# Altium PCB Python_stm32f4_V1.0.0.PcbDoc
Units mil, origin at the board's own origin, x right, y up, seen from the top; angles counter-clockwise.
Board outline 1850 x 1920 mil, 2 copper layers (Top Layer, Bottom Layer); 62 components, 70 nets, 251 pads, 193 vias.
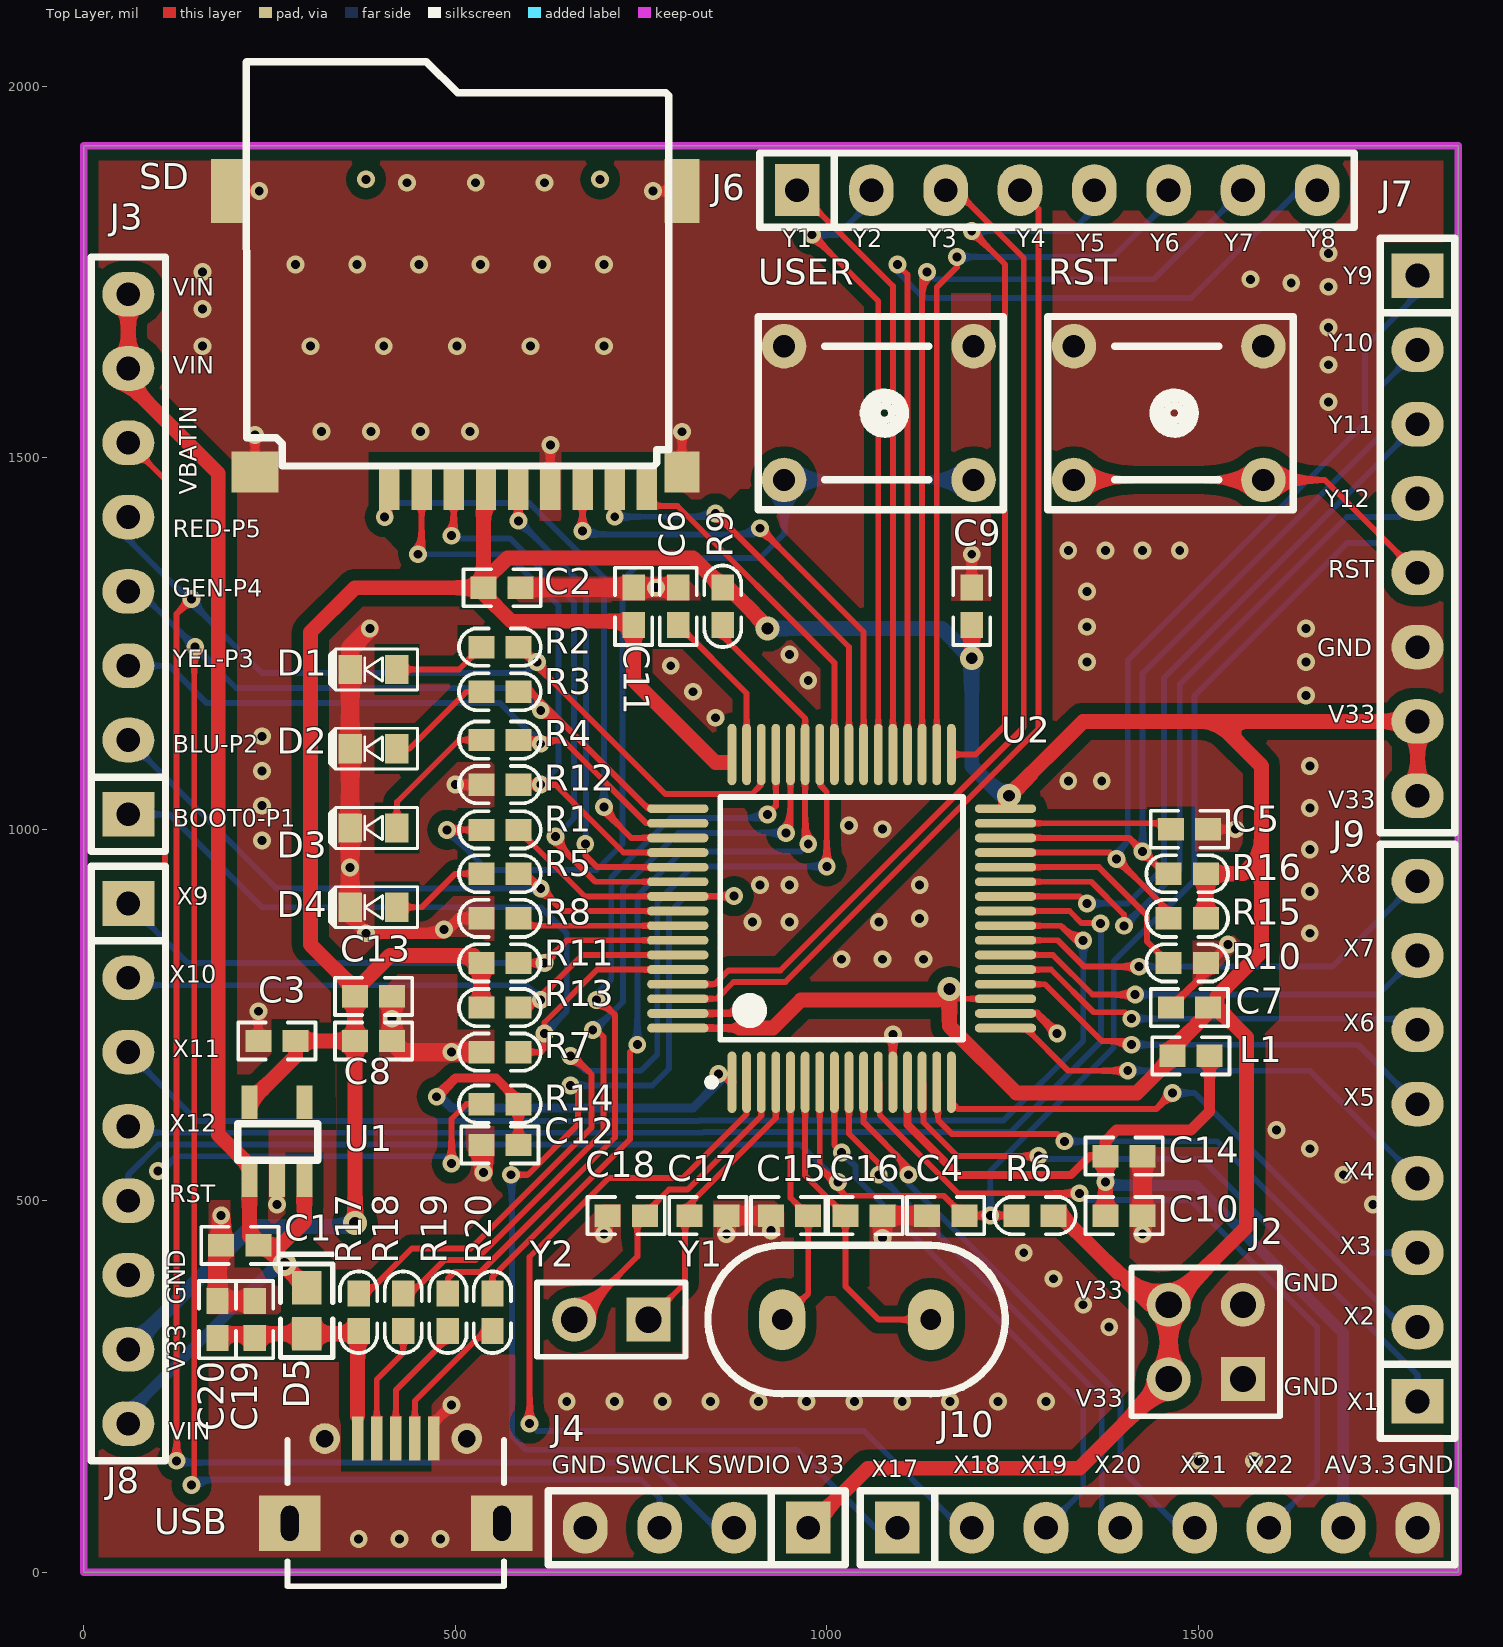
[diagram p0: Top Layer view]
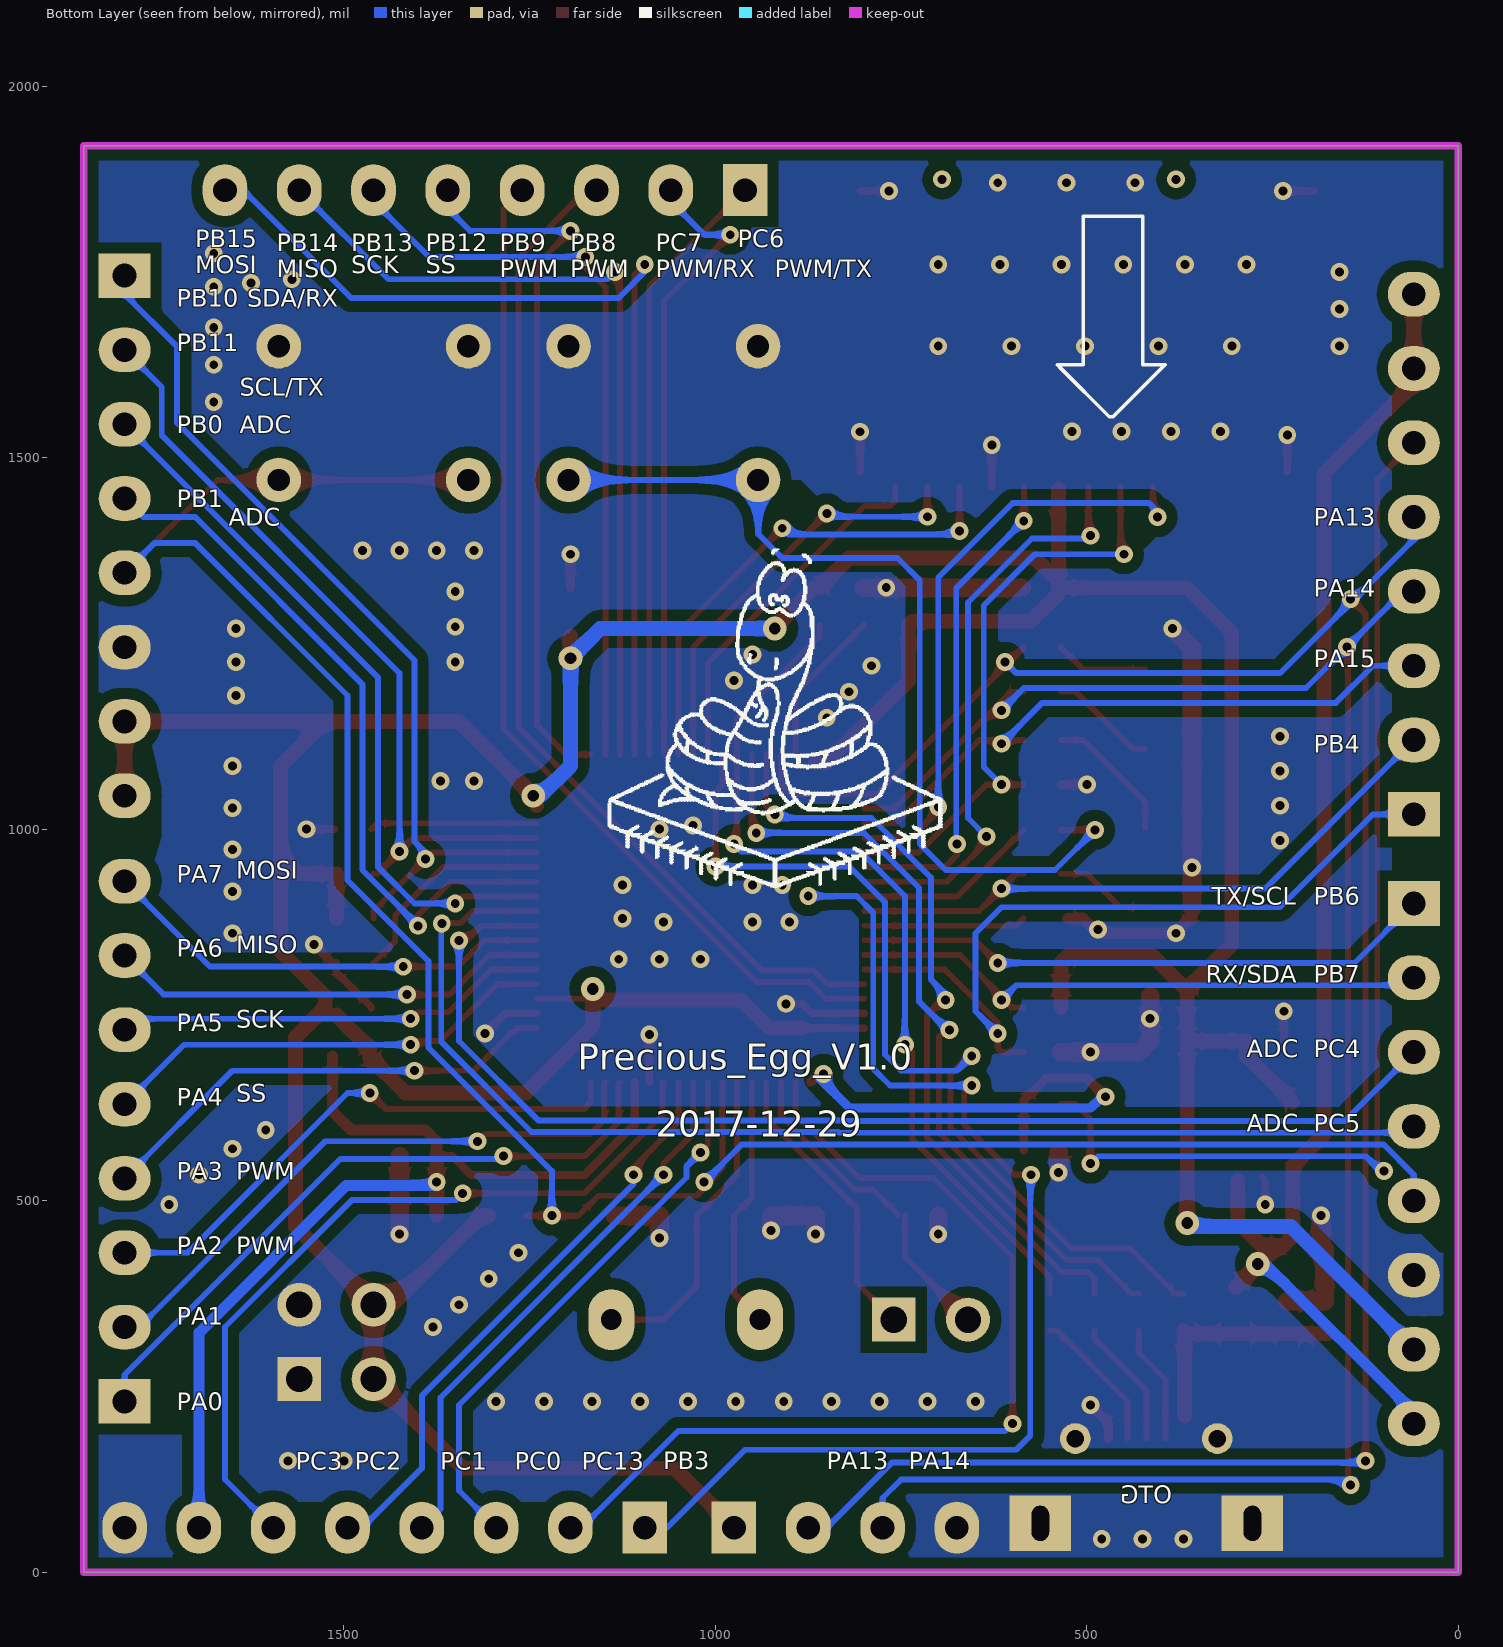
[diagram p1: Bottom Layer view, seen from below]
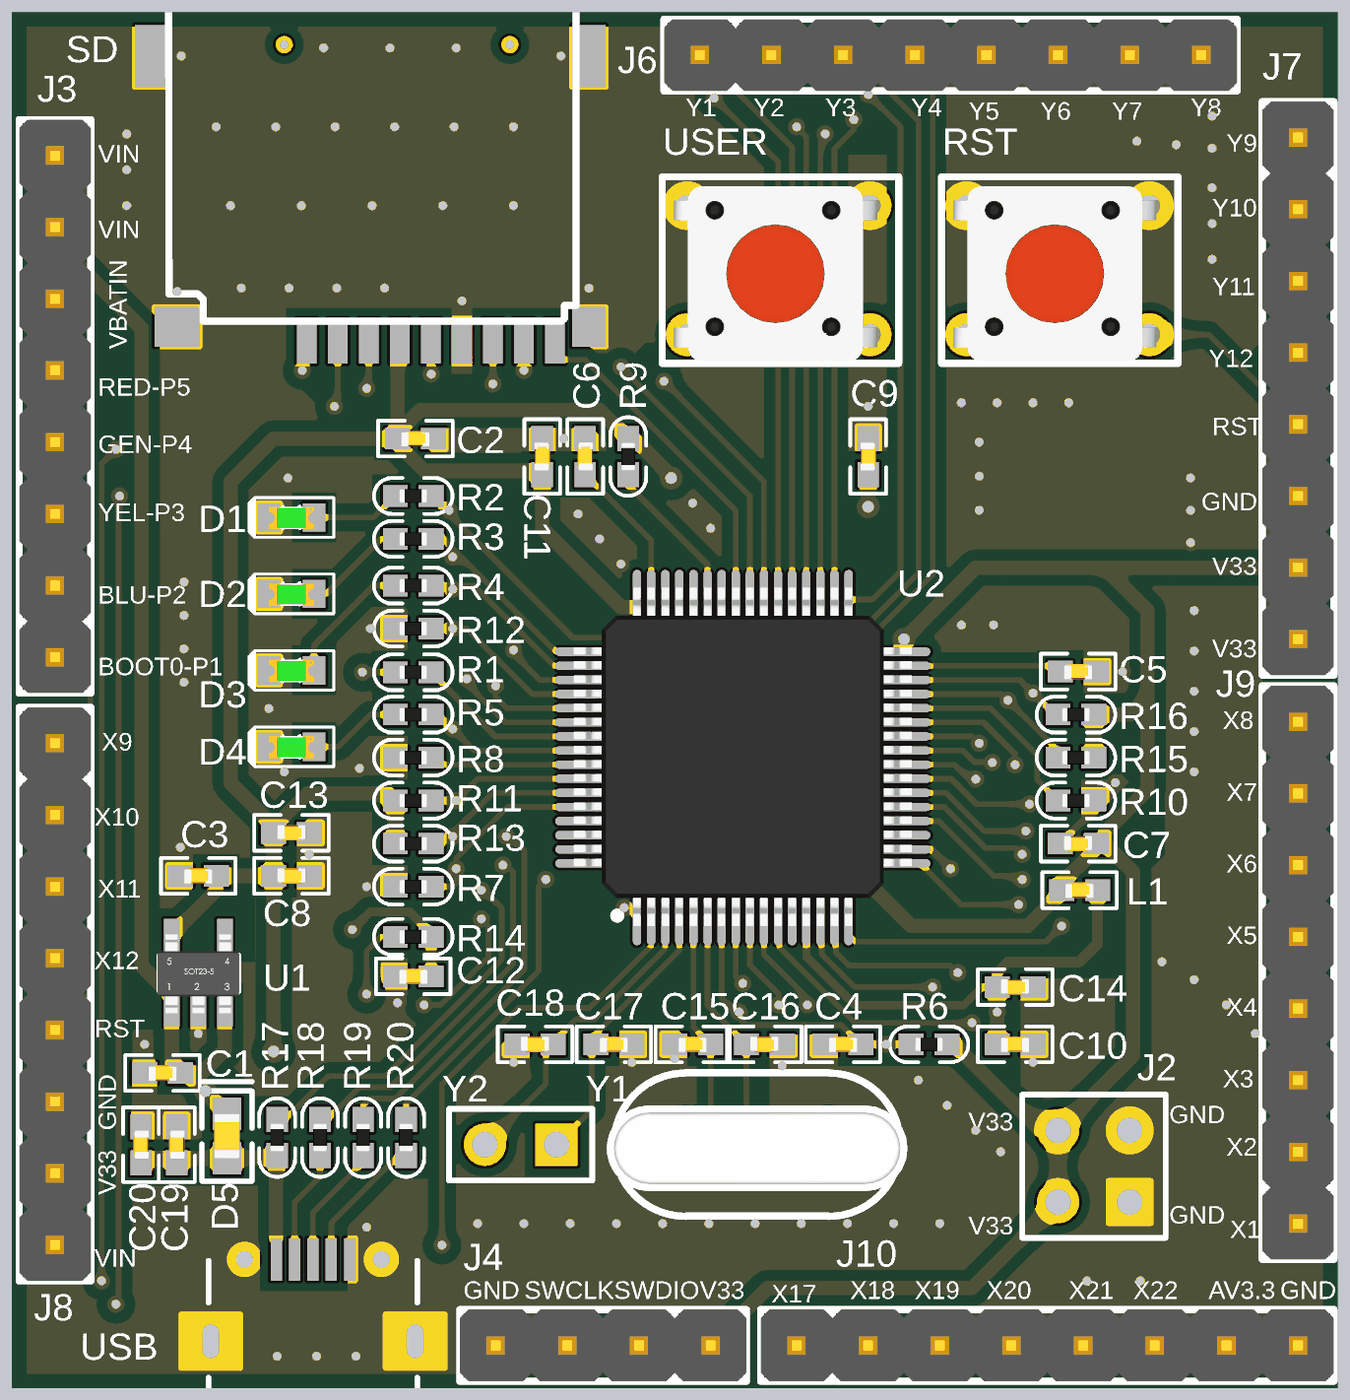
[diagram p2: 3D render of the assembled board from above, using the file's embedded part models]

## Layer stack, top to bottom
Top Solder: solder mask 0.4, Solder Resist, Dk 3.5
Top Layer: signal copper 1.4
Dielectric1: dielectric 12.6, FR-4, Dk 4.8
Bottom Layer: signal copper 1.4
Bottom Solder: solder mask 0.4, Solder Resist, Dk 3.5

## Board outline
0,0 0,1920 1850,1920 1850,0

## Design rules (kind name [scope] priority, off if disabled: settings)
Clearance Clearance_1 [(InPolygon)] p1: gap=15
Clearance [All] p2: gap=7.87
MinimumSolderMaskSliver [All] p1 off: minsoldermaskwidth=10
PolygonConnect [All] p1: connectstyle=Direct reliefconductorwidth=10 reliefentries=4 polygonreliefangle="90 Angle" airgapwidth=10
RoutingVias [All] p1: holewidth=10 width=20 viastyle="Through Hole" minholewidth=8 minwidth=16 maxholewidth=28 maxwidth=50
SilkToSilkClearance [All] p1 off: silktosilkclearance=10
SilkToSolderMaskClearance SilkscreenOverComponentPads [IsPad] p1 off: minsilkscreentomaskgap=10 clearancetoexposedcopper=TRUE
SolderMaskExpansion [All] p1: expansion=4
Width [All] p1: maxlimit=100 minlimit=7.87 preferedwidth=10
27 further rules are at their usual default settings.

## Components (designator, comment, footprint, x,y, rotation, side; value= is the part's Value field where it differs from the comment)
C1 "1uF" C0402 210,440 r270 top
C2 "2.2uF" C0402 563,1325 r270 top
C3 "1uF" C0402 260,715 r270 top
C4 "0.1uF" C0402 1160,480 r270 top
C5 "2.2uF" C0402 1488,1000 r270 top
C6 "2.2uF" C0402 800,1300 r0 top
C7 "2.2uF" C0402 1488,760 r90 top
C8 "0.1uF" C0402 390,715 r90 top
C9 "0.1uF" C0402 1195,1300 r180 top
C10 "2.2uF" C0402 1400,480 r270 top
C11 "0.1uF" C0402 740,1300 r180 top
C12 "0.1uF" C0402 560,575 r270 top
C13 "0.1uF" C0402 390,775 r90 top
C14 "0.1uF" C0402 1400,560 r90 top
C15 "18pF" C0402 950,480 r270 top
C16 "18pF" C0402 1050,480 r90 top
C17 "18pF" C0402 840,480 r270 top
C18 "18pF" C0402 730,480 r90 top
C19 "1uF" C0402 230,340 r0 top
C20 "4.7uF" C0402 180,340 r0 top
D1 "LED" LED0603-green 390,1215 r180 top
D2 "LED" LED0603-green 390,1108.33 r180 top
D3 "LED" LED0603-green 390,1001.67 r180 top
D4 "LED" LED0603-green 390,895 r180 top
D5 "SS14" Diode-0603 300,352 r180 top
J2 "Header 2X2-P9P10" HDR2X2 1560,260 r90 top
J3 "" HEADER-8 60,1020 r90 top
J4 "SWD" HEADER-4 825,60 r180 top
J6 "Header 8-Y1Y8" HEADER-8 960,1860 r0 top
J7 "Header 8-Y9Y16" HEADER-8 1795,1745 r270 top
J8 "Header 8-X9X16" HEADER-8 60,900 r270 top
J9 "Header 8-X1X8" HEADER-8 1795,230 r90 top
J10 "Header 8-X17X24" HEADER-8 1095,60 r0 top
L1 "Inductor" C0402 1490,695 r270 top
R1 "10K" "R0402 -1" 560,999 r90 top
R2 "510R" "R0402 -1" 560,1245 r270 top
R3 "510R" "R0402 -1" 560,1185 r270 top
R4 "510R" "R0402 -1" 560,1120 r270 top
R5 "510R" "R0402 -1" 560,940 r270 top
R6 "10K" "R0402 -1" 1280,480 r90 top
R7 "10K" "R0402 -1" 560,700 r90 top
R8 "10K" "R0402 -1" 560,880 r90 top
R9 "100K" "R0402 -1" 860,1300 r0 top
R10 "10K" "R0402 -1" 1485,820 r270 top
R11 "10K" "R0402 -1" 560,820 r270 top
R12 "10M" "R0402 -1" 560,1060 r90 top
R13 "10K" "R0402 -1" 560,760 r270 top
R14 "220R" "R0402 -1" 560,630 r90 top
R15 "10K" "R0402 -1" 1485,880 r90 top
R16 "10K" "R0402 -1" 1485,940 r90 top
R17 "510R" "R0402 -1" 370,350 r180 top
R18 "22R" "R0402 -1" 430,350 r180 top
R19 "22R" "R0402 -1" 490,350 r180 top
R20 "510R" "R0402 -1" 550,350 r180 top
RST "RST" SW-4PIN-DIP 1460,1560 r270 top (schematic designator K2)
SD "microSD PUSH-PULL" MICROSD-1 500,1660 r90 top locked (schematic designator J1)
U1 "\"TC1185-3.3VCT\"/\"XC6228D332VR\"/\"WL2801E33-5/TR\"/\"SPX5205M5\"" SOT-23-5 260,580 r90 top
U2 "STM32F405RGT6" LQFP-64 1020,880 r90 top locked
USB "macro USB" MICRO_USB_9 420,180 r0 top locked (schematic designator J5)
USER "USER" SW-4PIN-DIP 1070,1560 r270 top (schematic designator K1)
Y1 "XTAL" XTAL 1040,340 r180 top
Y2 "32.768K" HDR1X2 760,340 r180 top

## Footprints (in the part's own frame and the unit in brackets; to place one, negate y for a bottom-side part, rotate by r counter-clockwise, add the part's x,y. Pads: shape width x height; smd on the part's side, far side on the other; paste and mask are expansions set on the pad)
C0402 [mil] "SMT电容"
  rect 30x35 smd: 1(0,-25) 2(0,25)
  silkscreen extent -25,-52 25,52, body extent -11,-20 11,20, height 20
Diode-0603 [mil]
  rect 40x45 smd: 1(0,31) 2(0,-31)
  silkscreen extent -35,-76 35,63, body extent -18,-32 18,31, height 31
HDR1X2 [mm] "Connector; Header; 2 Position"
  rect 1.5x1.5 hole 0.9: 1(0,0)
  round 1.5 hole 0.9: 2(2.54,0)
  silkscreen extent -1.27,-1.27 3.81,1.27
HDR2X2 [mm] "Connector; Header; 2x2 Position"
  rect 1.5x1.5 hole 0.9: 1(0,0)
  round 1.5 hole 0.9: 2(0,2.54) 3(2.54,0) 4(2.54,2.54)
  silkscreen extent -1.27,-1.27 3.81,3.81
HEADER-4 [mil]
  rect 60x70 hole 32: 1(-150,0)
  oval 60x70 hole 32: 2(-50,0) 3(50,0) 4(150,0)
  silkscreen extent -200,-50 200,50, body extent -200,-50 200,50, height 398
HEADER-8 [mil]
  rect 60x70 hole 32: 1(0,0)
  oval 60x70 hole 32: 2(100,0) 3(200,0) 4(300,0) 5(400,0) 6(500,0) 7(600,0) 8(700,0)
  silkscreen extent -50,-50 750,50, body extent -50,-50 750,50, height 398
LED0603-green [mm]
  rect 0.8x1 smd: 1(-0.8,0) 2(0.8,0)
  silkscreen extent -1.5,-0.7 1.5,0.7, body extent -0.8,-0.38 0.8,0.42, height 0.6
LQFP-64 [mm] "LQFP64"
  oval 2.1x0.3 smd: 1(-5.6,3.75) 2(-5.6,3.25) 3(-5.6,2.75) 4(-5.6,2.25) 5(-5.6,1.75) 6(-5.6,1.25) 7(-5.6,0.75) 8(-5.6,0.25) 9(-5.6,-0.25) 10(-5.6,-0.75) 11(-5.6,-1.25) 12(-5.6,-1.75) 13(-5.6,-2.25) 14(-5.6,-2.75) 15(-5.6,-3.25) 16(-5.6,-3.75) 33(5.6,-3.75) 34(5.6,-3.25) 35(5.6,-2.75) 36(5.6,-2.25) 37(5.6,-1.75) 38(5.6,-1.25) 39(5.6,-0.75) 40(5.6,-0.25) 41(5.6,0.25) 42(5.6,0.75) 43(5.6,1.25) 44(5.6,1.75) 45(5.6,2.25) 46(5.6,2.75) 47(5.6,3.25) 48(5.6,3.75)
  oval 0.3x2.1 smd: 17(-3.75,-5.6) 18(-3.25,-5.6) 19(-2.75,-5.6) 20(-2.25,-5.6) 21(-1.75,-5.6) 22(-1.25,-5.6) 23(-0.75,-5.6) 24(-0.25,-5.6) 25(0.25,-5.6) 26(0.75,-5.6) 27(1.25,-5.6) 28(1.75,-5.6) 29(2.25,-5.6) 30(2.75,-5.6) 31(3.25,-5.6) 32(3.75,-5.6) 49(3.75,5.6) 50(3.25,5.6) 51(2.75,5.6) 52(2.25,5.6) 53(1.75,5.6) 54(1.25,5.6) 55(0.75,5.6) 56(0.25,5.6) 57(-0.25,5.6) 58(-0.75,5.6) 59(-1.25,5.6) 60(-1.75,5.6) 61(-2.25,5.6) 62(-2.75,5.6) 63(-3.25,5.6) 64(-3.75,5.6)
  silkscreen extent -5.72,-4.15 4.15,4.57, body extent -5.97,-6 6.03,6, height 1.6
MICRO_USB_9 [mm]
  rect 0.4x1.5 smd: 1(-1.3,0) 2(-0.65,0) 3(0,0) 4(0.65,0) 5(1.3,0)
  round 1.05 hole 0.6: 6(-2.425,0) 7(2.425,0)
  rect 2.1x1.9 hole 0.6 slot 1.2 at 90 deg: 8(-3.625,-2.9) 9(3.625,-2.9)
  silkscreen extent -3.7,-5.05 3.7,-0.05
MICROSD-1 [mm]
  rect 1.6x0.7 smd: 1(-5.05,2.25) 2(-5.05,1.15) 3(-5.05,0.05) 4(-5.05,-1.05) 5(-5.05,-2.15) 6(-5.05,-3.25) 7(-5.05,-4.35) 8(-5.05,-5.45) 9(-5.05,-6.55)
  rect 1.4x1.2 smd: GP1(-4.55,-7.75)
  rect 2.2x1.2 smd: GP2(5.05,-7.75) GP3(5.05,7.75)
  rect 1.4x1.6 smd: GP4(-4.55,6.85)
  silkscreen extent -4.35,-7.29 9.47,7.15
"R0402 -1" [mil] "SMT电阻"
  rect 30x35 smd: 1(0,-25) 2(0,25)
  silkscreen extent -25,-55 25,55, body extent -10,-20 10,20, height 15
SOT-23-5 [mil]
  rect 45x22 smd: 1(-52.5,37) 2(-52.5,0) 3(-52.5,-37) 4(52.5,-37) 5(52.5,37)
  silkscreen extent -26,-55 24,53, body extent -57,-57 54,57, height 43
SW-4PIN-DIP [mil]
  round 60 hole 30: 1(-90,127.5) 1(-90,-127.5) 2(90,127.5) 2(90,-127.5)
  silkscreen extent -130,-163 130,168, body extent -117,-160 127,151, height 191
XTAL [mil]
  oval 62x82 hole 28: 1(-100,0) 2(100,0)
  silkscreen extent -200,-100 200,100, body extent -210,-55 210,65, height 122

## Part data
C1 C3 C4 C8 C9 C11 C12 C13 C14 C19: library part 电容
C2 C5 C6 C7 C10 C15 C16 C17 C18 C20: library part CAP, "SMT电容"
D1 D2 D3 D4: library part LED0, "Typical INFRARED GaAs LED"
D5: library part Diode
J2: library part "Header 2X2", "Header, 2-Pin, Dual row"
J3 J6 J7 J8 J9 J10: library part "Header 8", "Header, 8-Pin"
J4: library part CON4, "Connector"
R1 R2 R3 R4 R5 R6 R7 R8 R9 R10 R11 R12 R13 R14 R15 R16 R17 R18 R19 R20: library part RES1, "SMT电阻"
RST USER: library part SW-PB-1, "轻触按键"
U1: library part S1132, "LDO"
USB: "USB 2.0, Right Angle, SMT, B Type, Receptacle, 5 Position, Black"
Y1: "Crystal Oscillator"
Y2: library part XTAL

## Via types
v1: diameter 24, hole 12, Top Layer to Bottom Layer, tented both sides, 185 vias
v2: diameter 32, hole 16, Top Layer to Bottom Layer, tented both sides, 6 vias
v3: diameter 24, hole 12, Top Layer to Bottom Layer, 2 vias

## Nets (pads, with @x,y where several pads share a name; then routed paths per layer and width w, separated by ;. In a path a pad name is that pad's centre, name@x,y a point inside that pad or via, vN(x,y) a via of type N, cw(c..) or ccw(c..) an arc to the next point about the centre after c; other vN are vias at no path point)
AV3.3: C10.1 C14.2 J10.7 L1.2 U2.13 | length 1360
  Top Layer w11: U2.13 1108.58,602.37 1176.33,534.63 1328.74,534.63 1354.12,560 C14.2
  Top Layer w15: C14.2 1375,580 1390,595 1490,595 1515,620 L1.2
  Top Layer w20: C10.1 v1(1375,525) C14.2
  Bottom Layer w15: v1(1375,525) 1379.5,520.5 1496.81,520.5 1695,322.31 J10.7
BOOT0-P1: J3.1 R7.1 U2.60 | length 1084.8
  Top Layer w7.87: R7.1 595,700 615,700 620,705 v1(620,725) 620,740 691.1,811.1 U2.60
  Bottom Layer w7.87: J3.1 115,1020 240,895 615,895 650,860 650,755 v1(620,725)
DM: R18.2 USB.2 | length 159.7
  Top Layer w7.87: USB.2 394.41,259.41 430,295 R18.2
DP: R19.2 USB.3 | length 174
  Top Layer w7.87: USB.3 420,245 490,315 R19.2
GND: C1.1 C2.2 C3.1 C4.1 C5.2 C6.2 C7.2 C8.1 C9.1 C10.2 C11.1 C12.1 C13.1 C14.1 C15.1 C16.1 C17.2 C18.2 C19.2 C20.2 D1.2 D2.2 D3.2 D4.2 J2.1 J2.3 J4.4 J7.6 J8.6 J10.8 R7.2 R8.2 R10.2 R12.2 RST.1 SD.6 SD.GP1 SD.GP2 SD.GP3 SD.GP4 U1.2 U2.12 U2.18 U2.63 USB.5 USB.6 USB.7 USB.8 USB.9 USER.1 | length 2367.8
  Top Layer w7.87: v1(260,495) U1.2 U1.2@265,532.5
  Top Layer w10: SD.GP3 v1(236.18,1858.82) ; SD.GP4 v1(230.32,1530.32) ; C3.1 v1(235,755) ; SD.6 v1(627.95,1517.05) ; v1(766.18,1858.82) SD.GP2 ; U2.63 869.97,752.05 882.93,765 v1(905,765) ; v1@805,1535 v1(805.12,1534.88) SD.GP1 ; U2.12 v1(1088.9,723.9) ; U2.18 1282.95,752.05 v1(1310,725) ; C7.2 1463,760.71 1490.17,787.87 1490.87,787.87 1510,807 R10.2 1515,820 v1(1540,845) ; C5.2 v1(1550,1000)
  Top Layer w12: USB.5 471.18,201.18 v1(495,225) ; v1(500,1060) R12.2 ; C9.1 v1(1195,1370)
  Top Layer w15: D4.2 358.5,881.5 380.06,859.94 484.94,859.94 505,880 R8.2@525,880
  Top Layer w25: v1(185,480) C1.1 180,435 C20.2 C19.2 ; D4.2 v1(358.5,948.33) D3.2 D2.2 D1.2 358.5,1243.5 v1(385,1270) ; C13.1 C8.1 430,700 R7.2 ; v1(538,538) C12.1@538,565 ; C2.2 C11.1 C6.2 ; v1(700,455) C18.2@700,480 ; v1(865,455) C17.2 C15.1 v1(925,460) ; v1(1075,450) C16.1 C4.1 ; v1(1425,455) C10.2 C14.1
  other v1: 370,45 425,45 480,45 1500,150 1575,150 650,230 714.5,230 779,230 843.5,230 908,230 972.5,230 1037,230 1101.5,230 1166,230 1230.5,230 1295,230 1380,330 1345,360 1305,395 1265,430 1735,495 1695,535 1650,570 1605,595 495,700 415,745 1020,825 1075,825 1130,825 380,860 1650,860 485,865 900,875 950,875 1070,875 1125,880 1650,916.25 910,925 950,925 1125,925 1650,972.5 240,985 1075,1000 1030,1005 1650,1028.75 240,1031.67 1325,1065 1370,1065 240,1078.33 1650,1085 240,1125 850,1150 1645,1180 820,1185 975,1200 790,1220 1350,1225 1645,1225 950,1235 1645,1270 1350,1272.5 1350,1320 770,1325 1325,1375 1375,1375 1425,1375 1475,1375 320,1535 386.67,1535 453.33,1535 520,1535 1675,1575 1675,1625 160,1650 305,1650 403.75,1650 502.5,1650 601.25,1650 700,1650 1675,1675 160,1700 1675,1730 1625,1735 1570,1740 160,1750 285,1760 368,1760 451,1760 534,1760 617,1760 700,1760 1675,1775 435,1870 527.5,1870 620,1870
ID: R20.2 USB.4 | length 194.1
  Top Layer w7.87: USB.4 445.59,230.59 540,325 R20.2
NetC5_1: C5.1 U2.31 | length 225.8
  Top Layer w7.87: U2.31 1455.05,1007.95 C5.1
NetC6_1: C6.1 U2.47 | length 212.7
  Top Layer w7.87: C6.1 892.05,1182.95 U2.47
NetC15_2: C15.2 U2.5 Y1.2 | length 343.9
  Top Layer w7.87: Y1.2 975,375 C15.2 951.1,503.9 U2.5
NetC16_2: C16.2 U2.6 Y1.1 | length 430.6
  Top Layer w7.87: U2.6 970.79,534.21 C16.2 1025,385 1070,340 Y1.1
NetC17_1: C17.1 U2.4 Y2.1 | length 390.5
  Top Layer w7.87: Y2.1 809.25,389.25 809.25,489.25 931.42,611.42 U2.4
NetC18_1: C18.1 U2.3 Y2.2 | length 434.3
  Top Layer w7.87: Y2.2 745,425 C18.1@745,480 ; C18.1 755,482.27 787.73,515 812.73,515 911.73,614 U2.3
NetD1_1: D1.1 R2.1 | length 125.9
  Top Layer w7.87: D1.1 505,1215 R2.1
NetD2_1: D2.1 R3.1 | length 145.3
  Top Layer w7.87: D2.1 438.33,1108.33 515,1185 R3.1
NetD3_1: D3.1 R4.1 | length 182.9
  Top Layer w7.87: D3.1 421.5,1036.5 505,1120 R4.1
NetD4_1: D4.1 R5.1 | length 132.1
  Top Layer w7.87: D4.1 455,895 500,940 R5.1
NetK1_2: R1.2 USER.2 | length 1244.8
  Top Layer w7.87: v1(489,999) R1.2
  Bottom Layer w7.87: v1(489,999) 543,945 690,945 725,980 725,1335 755,1365 910,1365 942.5,1397.5 942.5,1470 USER.2@1197.5,1470
PA0-X1: J9.1 U2.14 | length 896.1
  Top Layer w7.87: U2.14 1130.24,657.56 1130.24,605.62 1175.86,560 v1(1285,560)
  Bottom Layer w7.87: v1(1285,560) 1288.81,556.19 1504.68,556.19 1795,265.87 J9.1
PA1-X2: J9.2 U2.15 | length 812.5
  Top Layer w7.87: U2.15 1149.92,657.56 1149.92,608.21 1168.13,590 1310,590 v1(1320,580)
  Bottom Layer w7.87: v1(1320,580) 1525,580 1775,330 J9.2
PA2-X3: J9.3 U2.16 | length 756.3
  Top Layer w7.87: U2.16 1167.64,632.36 1176.68,623.32 1443.32,623.32 v1(1465,645)
  Bottom Layer w7.87: v1(1465,645) 1495,645 1710,430 J9.3
PA3-X4: J9.4 U2.17 | length 638.3
  Top Layer w7.87: U2.17 1267.64,732.36 1325,675 v1(1405,675)
  Bottom Layer w7.87: v1(1405,675) 1650,675 J9.4
PA4-X5: J9.5 U2.20 | length 614.3
  Top Layer w7.87: U2.20 1293.58,791.42 1370,715 v1@1405,715
  Bottom Layer w7.87: v1(1410,710) 1715,710 J9.5
PA5-X6: J9.6 U2.21 | length 588.1
  Top Layer w7.87: U2.21 1301.63,811.1 1359.04,753.69 1401.31,753.69 v1(1410,745)
  Bottom Layer w7.87: v1(1410,745) 1780,745 J9.6
PA6-X7: J9.7 U2.22 | length 598.3
  Top Layer w7.87: U2.22 1304.21,830.79 1357.5,777.5 v1(1415,777.5)
  Bottom Layer w7.87: v1(1415,777.5) 1742.5,777.5 J9.7
PA7-X8: J9.8 U2.23 | length 616.9
  Top Layer w7.87: U2.23 1310.85,850.47 1346.33,815 v1(1420,815)
  Bottom Layer w7.87: v1(1420,815) 1680,815 J9.8
PA8-SDIO_SW: SD.9 U2.41 | length 485.2
  Top Layer w7.87: SD.9 757.87,1442.13 765,1435 799.2,1435 1010.16,1224.05 U2.41
PA9-VSUB: R17.1 U2.42 | length 1258.1
  Top Layer w7.87: R17.1 380.8,375 441.6,435.81 520.81,435.81 683.5,598.5 683.5,670 658.5,695 v1(655,695) ; U2.42 990.47,1059.67 1000,1050.14 v1(1000,950)
  Bottom Layer w7.87: v1(655,695) 675,675 750,675 771.81,696.81 771.81,901.81 820,950 v1(1000,950)
PA10-ID: R9.1 R20.1 U2.43 | length 1217.4
  Top Layer w7.87: R20.1 550,397.73 735,582.73 735,700 v1(745,710) ; R9.1 860,1260 970.79,1149.21 U2.43 970.79,984.21 v1(975,980)
  Bottom Layer w7.87: v1(745,710) 745,910 805,970 965,970 v1(975,980)
PA11-DM: R18.1 U2.44 | length 1061.3
  Top Layer w7.87: R18.1 440,375 485.06,420.06 527.33,420.06 699.25,591.98 699.25,720.75 v1@695,725 ; v1(945,995) 951.1,1001.1 U2.44
  Bottom Layer w7.87: v1(685,730) 687.92,730 725.75,767.83 725.75,920.75 800,995 v1(945,995)
PA12-DP: R19.1 U2.45 | length 1011.5
  Top Layer w7.87: R19.1 490,395 499.31,404.31 534.31,404.31 715,585 715,750 v1@700,765 ; v1(920,1020) 931.42,1031.42 U2.45
  Bottom Layer w7.87: v1(690,770) 690,777.92 710,797.92 710,935 790,1015 v1@920,1015
PA13-RED-P5: J3.5 J4.2 R2.2 U2.46 | length 3070.9
  Top Layer w7.87: v1(125,150) 125,1290 v1(145,1310) ; R2.2 782.68,1047.32 899.39,1047.32 911.73,1059.67 U2.46
  Bottom Layer w7.87: J3.5 60,1390 240,1210 595,1210 v1(610,1225) ; v1(125,150) 127.48,147.52 762.48,147.52 850,60 J4.2
PA14-GRN-P4: J3.4 J4.3 R3.2 U2.49 | length 2725.5
  Top Layer w7.87: v1(145,117.5) 148.81,121.31 148.81,1243.81 v1(150,1245) ; R3.2 602.27,1185 759.63,1027.64 U2.49
  Bottom Layer w7.87: J3.4 75,1320 205,1190 585,1190 v1(615,1160) ; v1(145,117.5) 145,120 140,125 750,125 775,100 J4.3
PA15-YEL-P3: J3.3 R4.2 U2.50 | length 859.4
  Top Layer w7.87: R4.2 645,1120 757.05,1007.95 U2.50
  Bottom Layer w7.87: J3.3 115,1220 165,1170 560,1170 v1(615,1115)
PB0-Y11: J7.3 U2.26 | length 975
  Top Layer w7.87: U2.26 1340.47,909.53 v1(1350,900)
  Bottom Layer w7.87: v1(1350,900) 1405,900 1453.81,948.81 1453.81,1203.81 J7.3
PB1-Y12: J7.4 U2.27 | length 972.5
  Top Layer w7.87: U2.27 1355.79,929.21 1400,885 v1(1400,870)
  Bottom Layer w7.87: v1(1400,870) 1475,945 1475,1195 1700,1420 1770,1420 J7.4
PB2-BOOT1-MMA-INT: R10.1 U2.28 | length 293.4
  Top Layer w7.87: U2.28 1366.1,948.9 1430.69,884.31 1430.69,849.31 R10.1
PB3-SW-X17: J10.1 R1.1 U2.55 | length 1877.4
  Top Layer w7.87: v1(575,535) 597.73,535 665,602.27 665,645 v1(655,655) ; R1.1 674.47,909.53 U2.55 874.53,909.53 v1(875,910)
  Bottom Layer w7.87: v1(575,535) 576.19,533.81 576.19,183.81 595,165 960,165 1065,60 J10.1 ; v1@650,655 765,655 787.56,677.56 787.56,887.56 810,910 v1(875,910)
PB4-BLU-P2: J3.2 R5.2 U2.56 | length 873.1
  Top Layer w7.87: R5.2 595,940 v1(615,920) 645.16,889.84 U2.56
  Bottom Layer w7.87: J3.2 260,920 v1(615,920)
PB5-MMA_AVDD: R8.1 U2.57 | length 218.6
  Top Layer w7.87: R8.1 594.84,870.16 U2.57
PB6-SCL-X9: J8.1 R11.2 U2.58 | length 825.3
  Top Layer w7.87: R11.2 v1(620,820) 650.47,850.47 U2.58
  Bottom Layer w7.87: J8.1 140,820 v1(620,820) ; v1@620,815 v1@625,815
PB7-SDA-X10: J8.2 R13.2 U2.59 | length 811.3
  Top Layer w7.87: R13.2 600,760 670.79,830.79 U2.59
  Bottom Layer w7.87: J8.2 70,790 595,790 v1(615,770)
PB8-Y3: J6.3 U2.61 | length 1382.9
  Top Layer w7.87: U2.61 849.15,791.42 867.8,810.08 937.73,810.08 1265,1137.35 1265,1768.67 1173.67,1860 J6.3
PB9-Y4: J6.4 U2.62 | length 1371.3
  Top Layer w7.87: U2.62 851.73,771.73 874.33,794.33 944.25,794.33 1285,1135.08 1285,1835 J6.4
PB10-Y9: J7.1 R15.2 U2.29 | length 1214.8
  Top Layer w7.87: U2.29 1381.42,968.58 1460,890 R15.2
  Bottom Layer w7.87: v1(1390,960) 1390,968.67 1405,983.67 1405,1227.27 1724.25,1546.52 1724.25,1649.25 1795,1720 J7.1
PB11-Y10: J7.2 R16.2 U2.30 | length 1067.8
  Top Layer w7.87: U2.30 1406.73,988.27 v1(1425,970) 1455,940 R16.2
  Bottom Layer w7.87: v1(1425,970) 1425,1210 1745,1530 1745,1595 J7.2
PB12-Y5: J6.5 U2.33 | length 974.8
  Top Layer w7.87: U2.33 1200.47,1100.47 1240,1140 1240,1760 v1(1195,1805)
  Bottom Layer w7.87: v1(1195,1805) 1330,1805 1360,1835 J6.5
PB13-Y6: J6.6 U2.34 | length 1011.8
  Top Layer w7.87: U2.34 1147.95,1729.28 1175,1756.33 v1(1175,1770)
  Bottom Layer w7.87: v1(1175,1770) 1385,1770 1460,1845 J6.6
PB14-Y7: J6.7 U2.35 | length 1133.2
  Top Layer w7.87: U2.35 1128.27,1746.73 1131.54,1750 v1(1135,1750)
  Bottom Layer w7.87: v1(1135,1750) 1145,1740 1440,1740 J6.7
PB15-Y8: J6.8 U2.36 | length 1314.7
  Top Layer w7.87: v1(1095,1760) 1108.58,1746.42 U2.36
  Bottom Layer w7.87: v1(1095,1760) 1095,1750 1130,1715 1490,1715 1635,1860 J6.8
PC0-X19: J10.3 U2.8 | length 758.9
  Top Layer w7.87: U2.8 1010.16,574.84 v1(1020,565)
  Bottom Layer w7.87: v1(1020,565) 1038.81,546.19 1038.81,531.19 1345,225 1345,110 J10.3
PC1-X20: J10.4 U2.9 | length 750.8
  Top Layer w7.87: U2.9 1029.84,590.16 1070,550 v1(1070,535)
  Bottom Layer w7.87: v1(1070,535) 1370,235 1370,85 J10.4
PC2-X21: J10.5 U2.10 | length 795.8
  Top Layer w7.87: U2.10 1049.53,605.47 1110,545 v1(1110,535)
  Bottom Layer w7.87: v1(1110,535) 1110,522.73 1395,237.73 1395,140 1475,60 J10.5
PC3-X22: J10.6 U2.11 | length 1050.1
  Top Layer w7.87: U2.11 1071.18,659.53 1071.18,615.29 1176.47,510 v1(1340,510)
  Bottom Layer w7.87: v1(1340,510) 1348.81,501.19 1488.81,501.19 1660,330 1660,125 J10.6
PC4-X11: J8.3 U2.24 | length 1616
  Top Layer w7.87: U2.24 1314.84,870.16 1335,850 v1(1345,850)
  Bottom Layer w7.87: J8.3 152.81,607.19 827.38,607.19 828.38,608.19 1238.19,608.19 1345,715 v1(1345,850)
PC5-X12: J8.4 U2.25 | length 1657.2
  Top Layer w7.87: U2.25 1326.48,889.84 1342.52,873.81 1367.36,873.81 v1(1368.13,873.05)
  Bottom Layer w7.87: J8.4 68.56,591.44 833.9,591.44 834.9,592.44 1247.44,592.44 1368.81,713.81 1368.81,872.36 v1(1368.13,873.05)
PC6-Y1: J6.1 U2.37 | length 812.9
  Top Layer w7.87: J6.1 1088.9,1731.1 U2.37
PC7-Y2: J6.2 U2.38 | length 850.1
  Top Layer w7.87: v1(980,1800) 1069.21,1710.79 U2.38
  Bottom Layer w7.87: v1(980,1800) 1015,1800 1060,1845 J6.2
PC8-SDIO_D0: SD.7 U2.39 | length 666.4
  Top Layer w7.87: v1(671.26,1401.26) SD.7 ; v1(910,1405) 1049.53,1265.47 U2.39
  Bottom Layer w7.87: v1(671.26,1401.26) 675.9,1396.62 901.62,1396.62 v1(910,1405)
PC9-SDIO_D1: SD.8 U2.40 | length 577.7
  Top Layer w7.87: SD.8 v1(714.57,1420.43) v1@715,1420 ; v1(850,1425) 1029.84,1245.16 U2.40
  Bottom Layer w7.87: v1(714.57,1420.43) 845.43,1420.43 v1(850,1425)
PC10-SDIO_D2: SD.1 U2.51 | length 821.1
  Top Layer w7.87: v1(405,1420) 411.42,1426.42 SD.1 ; v1(700,1030) 700,1025 736.73,988.27 U2.51
  Bottom Layer w7.87: v1(405,1420) 405,1427.62 416.19,1438.81 600.04,1438.81 700,1338.85 v1(700,1030)
PC11-SDIO_D3: R12.1 SD.2 U2.52 | length 813.9
  Top Layer w7.87: v1(450,1370) 454.72,1374.72 SD.2 ; R12.1 v1(615,1060) 635,1060 726.42,968.58 U2.52
  Bottom Layer w7.87: v1(450,1370) 570,1370 638.81,1301.19 638.81,1083.81 v1(615,1060)
PC12-SDIO_CK: SD.5 U2.53 | length 665.4
  Top Layer w7.87: SD.5 584.65,1415.35 v1(585,1415) ; v1(675,980) 675,965 691.1,948.9 U2.53
  Bottom Layer w7.87: v1(585,1415) 675.75,1324.25 675.75,980.75 v1(675,980)
PC13-X18: J10.2 U2.2 | length 1296.9
  Top Layer w7.87: v1(600,200) 600,424.2 706.54,530.75 806.21,530.75 892.05,616.59 U2.2
  Bottom Layer w7.87: v1(600,200) 610,190 1050,190 1180,60 J10.2@1200,60
PD2-SDIO_CMD: SD.3 U2.54 | length 780.6
  Top Layer w7.87: v1(495,1395) 498.03,1398.03 SD.3 ; v1@635,980 637.73,980 688.52,929.21 U2.54
  Bottom Layer w7.87: v1(495,1395) 498.81,1391.19 573.81,1391.19 660,1305 660,1015 v1(635,990)
RST#: C4.2 J7.5 J8.5 R6.2 RST.2 U2.7 | length 3161.5
  Top Layer w7.87: U2.7 990.47,544.53 v1@1007.5,527.5 ; v1@1017.5,527.5 1017.5,514.31 1025,506.81 1157.39,506.81 1184.2,480 C4.2 v1(1220,480) R6.2 ; RST.2@1332.5,1470 1587.5,1470 1670,1470 J7.5
  Bottom Layer w7.87: J8.5 60,535 100.69,575.69 964.31,575.69 v1(1015,525) ; v1(1220,480) 1220,540 1386.19,706.19 1386.19,822.52 1495,931.33 1495,1180 1700,1385 1755,1385 J7.5
V3.3: C2.1 C3.2 C7.1 C8.2 C9.2 C11.2 C13.2 J2.2 J2.4 J4.1 J7.7 J7.8 J8.7 L1.1 R6.1 R9.2 R11.1 R13.1 R15.1 R16.1 SD.4 U1.5 U2.19 U2.32 U2.48 U2.64 | length 7040.9
  Top Layer w7.87: v2(1165,785) 1178.27,771.73 U2.19
  Top Layer w10: U2.64 882.64,732.36
  Top Layer w20: U1.5 285,694.5 C3.2 C8.2 ; v2(365,470) C8.2 ; R13.1 R11.1 525,830 412.22,830 C13.2@365,782.78 ; SD.4@538,1457.84 C2.1@538,1332.78 ; 865,1090 850,1090 740,1200 C11.2 735.13,1279.87 575.35,1279.87 538,1317.22 C2.1 ; 882.64,732.36 927.36,732.36 965,770 1150,770 v2(1165,785) 1165,735 1254.87,645.13 1417.37,645.13 1465,692.75 L1.1 1465,705 1487.13,727.13 1487.9,727.13 1498.37,737.6 1498.37,738.37 C7.1@1510,750 ; v2(920,1270) 920,1272.78 867.78,1325 R9.2 820,1365 570.22,1365 C2.1@538,1332.78 ; J4.1 1055,140 1340,140 J2.2 J2.4 ; v2(1195,1230) C9.2@1195,1260 ; U2.32@1240.47,1031.73 1240.47,1040.47 v2(1245,1045) 1345,1145 1525,1145 ; R6.1 1315,480 1435,360 J2.4 ; R15.1 R16.1 1560,940 1585,965 ; J7.8 J7.7 1525,1145 ; C8.2 C13.2 C13.2@365,782.78 ; C13.2@365,782.78 365,784.88 305,844.88 305,1265 365,1325 C2.1 ; C2.1 C2.1@538,1332.78 ; J2.4 1565,465 1565,720 1525,760 1525,775 1585,835 1585,965 ; 1525,1145 1585,1085 1585,965
  Bottom Layer w20: J8.7 225.13,465.13 360.13,465.13 v2(365,470) ; v2(920,1270) 1155,1270 v2(1195,1230) 1195,1085 1235,1045 v2(1245,1045)
VBAT: C12.2 R14.1 U2.1 | length 630.1
  Top Layer w7.87: U2.1@872.31,659.57 U2.1
  Top Layer w12: v1(475,640) 500,665 555,665 585,635 C12.2@585,568 ; v1(854.39,670.61) 861.19,670.61 U2.1@872.27,659.53
  Bottom Layer w10: v1(475,640) v1@479.99,640
  Bottom Layer w12: v1@479.99,640 494.99,625 820,625 v1@860,665
VBATIN: J3.6 R14.2 | length 1520.5
  Top Layer w7.87: J3.6 110,1470 109.25,1469.25 109.25,549.25 v1(100,540) ; v1(495,550) 495,610 515,630 R14.2
  Bottom Layer w7.87: v1(100,540) 105,540 124.95,559.95 485.05,559.95 v1(495,550)
VBUS: C19.1 C20.1 D5.1 R17.2 USB.1 | length 305.6
  Top Layer w20: C20.1@176,321 D5.1 R17.2@366,321 ; 368.66,210 368.66,323.66 R17.2
VIN: C1.2 D5.2 J3.7 J3.8 J8.8 U1.1 U1.3 | length 1871.7
  Top Layer w20: J3.8 J3.7 60,1600 180.95,1479.05 180.95,589.05 223,547 U1.1 223,452 C1.2 C1.2@243,440 ; U1.3 297,472 265,440 C1.2@243,440 ; D5.2 C1.2@243,440
  Bottom Layer w7.87: J8.8 J8.8@60,215
  Bottom Layer w15: J8.8@60,215 260,415 v2(270,415)
pads on no net: U1.4
copper on no net:
  other v3: 379.92,1874.57 694.88,1874.57

## Polygon pours and split planes (outlines as drawn)
GND on Bottom Layer "Bottom Layer-No Net" (solid, remove dead copper, pour order 26): 0,1920 1850,1920 1850,0 5,0 0,5 0,0 0,1920
GND on Top Layer "Bottom Layer-No Net" (solid, remove dead copper, pour order 28): 5,1920 1850,1920 1855,1915 1855,-5 5,-5 0,-10 5,-5 5,1920

## Keep-outs
Keep-Out Layer:
  the board outline again, w10

## Other copper
Top Layer:
  pour cut-out: 1756.38,1114.89 1760,1111.27 1760,1065 1769.02,1074.02 1769.02,1085.02 1769.21,1085.21 1769.21,1103.02 1757.34,1114.89
  pour cut-out: 1745,990 1746.16,991.16 1746.16,1033.25 1761.88,1017.53 1761.88,1009.85 1763.65,1008.08 1763.65,1005.35 1748.31,990
  pour cut-out: 1527.26,812.3 1504.96,790 1510,790 1520,800 1530,800 1527.26,802.74
  pour cut-out: 1608.91,827.05 1608.91,743.91 1580,715 1580,720.67 1535.68,764.99 1539.99,764.99 1605,830
  pour cut-out: 1407.5,572.06 1542.06,572.06 1545,575 1545,601.69 1539.51,607.18 1537.82,607.18 1530,615 1530,610 1515,595 1515,587.56 1506.22,578.78 1438.78,578.78 1435,575 1410.44,575
  pour cut-out: 1407.5,572.06 1407.5,423.55 1385.67,445.38 1390.29,450 1407.5,450 1407.5,503.03 1400.53,510 1400.53,565.09
  pour cut-out: 1057.5,450 1057.5,385.81 1054.5,382.81 1055,382.31 1044.31,393 1044.31,450
  pour cut-out: 994.31,450 1005.69,450 1011.35,444.34 1011.35,371.35 998.65,371.35 985.34,358.03 985.34,441.03
  pour cut-out: 847.5,500.19 929.58,500.19 933.26,496.51 933.26,576.49 931.79,577.96 929.09,577.96 927.17,579.87
  pour cut-out: 722.5,450 725.69,433 725.69,450
  pour cut-out: 700,495 725,495 725,507.5 721.06,511.44 714.54,511.44 708.1,505 695,505 695,500
  pour cut-out: 168.12,559.3 170.82,559.3 172.74,561.21 197,536.95 197,500.83 168.12,500.83
  pour cut-out: 1542.5,969.98 1552.96,969.98 1555.07,972.1 1555.07,971.12 1549.44,965.49 1542.5,965.49
  pour cut-out: 1542.5,914.51 1559.51,914.51 1559.51,845.56 1545.07,860 1545,860 1540,865 1540,912.01
  pour cut-out: 1745,1455 1738.2,1455 1725.26,1442.05 1745.48,1421.83 1746.89,1421.83 1749.72,1424.66 1746.16,1428.22 1746.16,1446.79 1745,1447.95
  pour cut-out: 930,110 780,110 770,100 780,90 780,5 914.61,5 930,20.39
  pour cut-out: 1334.31,87.69 1692.69,87.69 1695,90 1700,85 1700,0 1351.86,0 1331.47,20.39 1334.31,23.23 1334.31,87.69 1340,93.39 1340,125 1305,125 1295,115 1307,115
  pour cut-out: 1760,1005 1745,990 1745,260 1750,255 1850,255 1845,260 1845,1010 1771.61,1010 1767.31,1005.69
  pour cut-out: 1745,1700 1745,1434.41 1754.41,1425 1850,1425 1850,1679.61 1829.61,1700
  pour cut-out: 1167.26,1721.28 1220.69,1721.28 1220.69,1743.56 1230.34,1753.22 1215,1757.69 1206.74,1765.95 1203.74,1762.95 1201.31,1762.95 1194.01,1753.22
  pour cut-out: 1304.31,1832.31 1667.69,1832.31 1660,1840 1660,1900 1445,1900 1435,1910 1430,1905 1290,1905 1290,1849.31 1304.31,1835
  pour cut-out: 869.26,1444.26 883.25,1458.25 898.66,1458.25 905,1450 911.48,1437.08 908.6,1434.2 908.6,1432.05 896.18,1428.79 888.5,1421.11 881.64,1421.11 877.55,1425.2 874.22,1437.08
  pour cut-out: 817.25,1444.26 830.74,1444.26 830.74,1443.41 826.94,1439.61 821.9,1439.61
  pour cut-out: 613.43,1414.68 613.74,1415 641.4,1415 645.87,1410.53 644.03,1408.68 644.03,1396.47 644.75,1395.74 641.77,1392.76 641.77,1390.49 605.62,1390.49 603.93,1392.19 603.93,1406.42 612.19,1414.68
  pour cut-out: 405,1392.77 422.77,1375 422.77,1381.14 435.42,1393.79 435.42,1409.81 431.41,1409.81 430.42,1410.81 412.38,1392.77
  pour cut-out: 0,470 104.8,470 105.69,470.9 105.69,329.1 27.76,329.1 0,356.86
  pour cut-out: 249,595 249,565 223.62,590.38 215.67,590.38 215.67,593.09 217.58,595 249,595 249,620.3 266.38,637.68 266.38,639.83 269.09,639.83 271,637.92 271,595
  pour cut-out: 308.6,685 301.17,677.57 301.17,674.62 302.5,670 314.37,664.37 323,670 323,595 339.51,595 339.47,685 332.5,685 332.5,689.51 317.5,689.51 317.5,685
  pour cut-out: 308.94,447.89 340,416.83 340,354.02 338.88,354.02 337.5,352.64 336.12,354.02 335,354.02 335,420.5 334.99,420.51 300.54,420.51 300.54,427.88 294.74,433.69
  pour cut-out: 260,282.5 343.17,282.5 343.17,292.12 342.28,291.23 335,291.23 335,283.5 265,283.5 265,286.74 262.31,289.43 260.99,288.11 260,288.11
Bottom Layer:
  pour cut-out: 23.26,345.02 20.39,347.89 20.39,336.47 22.86,334 33.41,334 44.43,345.02
  pour cut-out: 20,430 25,430 50,455 36.39,455 25.39,466 22.86,466 20.39,463.53 20.39,430.39
  pour cut-out: 863.62,1448.58 885.03,1470 897.11,1470 900,1452.46 911.22,1437.12 909.09,1434.99 909.09,1432.2 903.34,1432.2 886.43,1418.63 885.03,1417.23 879.85,1418.63 878.98,1417.76 876.7,1420.04 876.7,1432.2 869.26,1442.07 869.26,1444.26 867.94,1444.26
  pour cut-out: 1745,185 1717.94,185 1717.94,309.09 1719.85,311 1722.56,311 1753.95,279.62 1752.03,277.71 1752.03,275 1745,275
  pour cut-out: 591.42,1101.38 591.46,978.54 610,960 650,960 640.69,969.31 640.69,1052.11
  pour cut-out: 397.95,1393.69 406.31,1393.69 445,1355 495,1405 495,1420 490,1420 475,1435 470,1430 434.26,1430
  pour cut-out: 1067.86,1759.31 1061.51,1759.31 1015,1805.82 1015,1920 1225,1920 1240,1905 1160,1825 1185,1820 1168.69,1797.95 1160,1770 1077.77,1770 1067.77,1760
  pour cut-out: 1767.31,1105.69 1758,1115 1745,1056.75 1745,990 1775,885 1850,885 1840,895 1840,1115 1776.61,1115
  pour cut-out: 1195,90 1195,10 1205,0 1215,10 1615,10 1615,80 1600,95 1190,95
  pour cut-out: 90,645 5,645 0,640 0,1695 10,1705 90,1705

## Silkscreen, mask and mechanical layers (free items; w line width, h text height)
Top Overlay:
  text "Y1" at 940,1775 h40
  text "Y2" at 1035,1775 h40
  text "Y3" at 1135,1775 h40
  text "Y4" at 1255,1775 h40
  text "Y8" at 1645,1775 h40
  text "Y5" at 1335,1770 h40
  text "Y6" at 1435,1770 h40
  text "Y7" at 1535,1770 h40
  text "Y9" at 1695,1725 h40
  text "VIN" at 120,1710 h40
  text "Y10" at 1675,1635 h40
  text "VIN" at 120,1605 h40
  text "Y11" at 1675,1525 h40
  text "VBATIN" at 160,1450 h40 r90
  text "Y12" at 1670,1425 h40
  text "RED-P5" at 120,1385 h40
  text "RST" at 1675,1330 h40
  text "GEN-P4" at 120,1305 h40
  text "GND" at 1660,1225 h40
  text "YEL-P3" at 120,1210 h40
  text "V33" at 1675,1135 h40
  text "BLU-P2" at 120,1095 h40
  text "V33" at 1675,1020 h40
  text "BOOT0-P1" at 120,995 h40
  text "X8" at 1690,920 h40
  text "X9" at 125,890 h40
  text "X7" at 1695,820 h40
  text "X10" at 115,785 h40
  text "X6" at 1695,720 h40
  text "X11" at 120,685 h40
  text "X5" at 1695,620 h40
  text "X12" at 115,585 h40
  text "X4" at 1695,520 h40
  text "RST" at 115,490 h40
  text "X3" at 1690,420 h40
  text "GND" at 1615,370 h40
  text "GND" at 145,360 h40 r90
  text "V33" at 1335,360 h40
  text "X2" at 1695,325 h40
  text "V33" at 145,270 h40 r90
  text "GND" at 1615,230 h40
  text "V33" at 1335,215 h40
  text "X1" at 1700,210 h40
  text "VIN" at 115,170 h40
  text "GND" at 630,125 h40
  text "SWCLK" at 715,125 h40
  text "SWDIO" at 840,125 h40
  text "V33" at 960,125 h40
  text "X18" at 1170,125 h40
  text "X19" at 1260,125 h40
  text "X20" at 1360,125 h40
  text "X21" at 1475,125 h40
  text "X22" at 1565,125 h40
  text "AV3.3" at 1670,125 h40
  text "GND" at 1770,125 h40
  text "X17" at 1060,120 h40
Bottom Overlay:
  drawing of 3460 lines, arcs and shapes, not listed
  text "PC6" at 970,1775 h40
  text "PB15" at 1700,1775 h40
  text "PC7" at 1080,1770 h40
  text "PB8" at 1195,1770 h40
  text "PB9" at 1290,1770 h40
  text "PB12" at 1390,1770 h40
  text "PB13" at 1490,1770 h40
  text "PB14" at 1590,1770 h40
  text "SS" at 1390,1740 h40
  text "SCK" at 1490,1740 h40
  text "MOSI" at 1700,1740 h40
  text "PWM/TX" at 920,1735 h40
  text "PWM/RX" at 1080,1735 h40
  text "PWM" at 1195,1735 h40
  text "PWM" at 1290,1735 h40
  text "MISO" at 1590,1735 h40
  text "SDA/RX" at 1630,1695 h40
  text "PB10" at 1725,1695 h40
  text "PB11" at 1725,1635 h40
  text "SCL/TX" at 1640,1575 h40
  text "ADC" at 1640,1525 h40
  text "PB0" at 1725,1525 h40
  text "PB1" at 1725,1425 h40
  text "PA13" at 195,1400 h40
  text "ADC" at 1655,1400 h40
  text "PA14" at 195,1305 h40
  text "PA15" at 195,1210 h40
  text "PB4" at 195,1095 h40
  text "MOSI" at 1645,925 h40
  text "PA7" at 1725,920 h40
  text "PB6" at 195,890 h40
  text "TX/SCL" at 332.08,890 h40
  text "MISO" at 1645,825 h40
  text "PA6" at 1725,820 h40
  text "PB7" at 195,785 h40
  text "RX/SDA" at 340,785 h40
  text "SCK" at 1645,725 h40
  text "PA5" at 1725,720 h40
  text "PC4" at 195,685 h40
  text "ADC" at 285,685 h40
  text "Precious_Egg_V1.0" at 1185,665 h60
  text "SS" at 1645,625 h40
  text "PA4" at 1725,620 h40
  text "PC5" at 195,585 h40
  text "ADC" at 285,585 h40
  text "2017-12-29" at 1080,575 h60
  text "PWM" at 1645,520 h40
  text "PA3" at 1725,520 h40
  text "PWM" at 1645,420 h40
  text "PA2" at 1725,420 h40
  text "PA1" at 1725,325 h40
  text "PA0" at 1725,210 h40
  text "PA14" at 740,130.33 h40
  text "PA13" at 850,130.33 h40
  text "PB3" at 1070,130.33 h40
  text "PC13" at 1180,130 h40
  text "PC0" at 1270,130 h40
  text "PC1" at 1370,130 h40
  text "PC2" at 1485,130 h40
  text "PC3" at 1565,130 h40
  text "OTG" at 385,85 h40